# Altium PCB PCB1.PcbDoc (part 3 of 3)
Units mil, origin at the board's own origin, x right, y up, seen from the top; angles counter-clockwise.
Board outline 3200 x 1500 mil, 4 copper layers (L1, L2, L3, L4), stack 61.583 mil thick; 64 components, 73 nets, 299 pads, 164 vias.
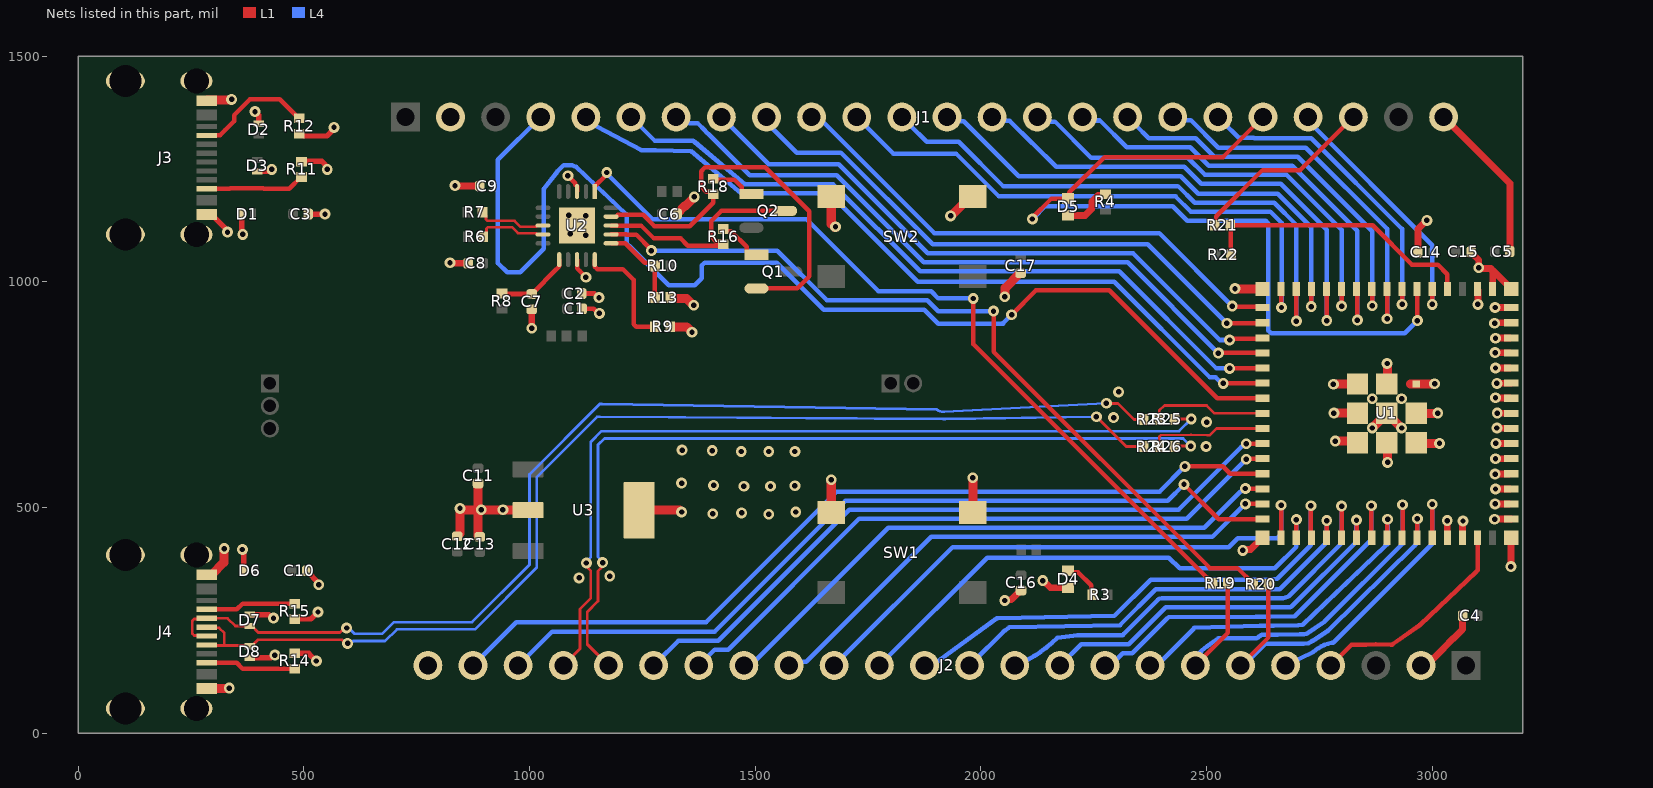
[diagram p4: the nets of this part, all layers, seen from the top]

## Via types
v1: diameter 24, hole 12, L1 to L4, tented both sides, 164 vias

## Nets (pads, with @x,y where several pads share a name; then routed paths per layer and width w, separated by ;. In a path a pad name is that pad's centre, name@x,y a point inside that pad or via, vN(x,y) a via of type N, cw(c..) or ccw(c..) an arc to the next point about the centre after c; other vN are vias at no path point) (continued)
CON2_USB_N: D7.2 J4.A7 J4.B7 R23.1 | length 2540
  L1 w6.02: J4.A7@284.84,215.16 283.39,216.61 257.02,216.61 253.19,220.44 253.19,249.08 257.1,252.99 283.31,252.99 J4.B7@284.84,254.53 331.11,254.53 348.44,237.2 D7.2@380,237.2 384.92,237.2 399.13,223 580.46,223 590.46,233 v1(595,233) ; v1(2278,731) 2278.85,730.15 2303.85,730.15 2339,695 R23.1@2361,695
  L4 w6.02: v1(595,233) 599.87,233 612.87,220 673.49,220 699.49,246 872.86,246 999.98,373.12 999.98,573.49 1155.72,729.24 1160.71,729.24 1901.96,717.02 ccw(c1917,737) 1918,712.01 ccw(c1917,737) 1918.32,712.02 v1(2278,731)
CON2_USB_P: D8.2 J4.A6 J4.B6 R24.1 | length 2511.6
  L1 w6.02: J4.B6@284.84,195.47 286.18,194.13 324,194.13 ; J4.A6@284.84,234.84 286.39,233.29 312.57,233.29 324,221.86 324,194.13 ; v1(597,199) 592.46,199 584.48,206.98 398.79,206.98 388.8,196.99 388.8,196.68 384.92,192.8 D8.2@380,192.8 378.66,194.13 324,194.13 ; v1(2256,701) 2322,635 R24.1@2361,635
  L4 w6.02: v1(597,199) 600.44,202.44 607.98,202.44 609.52,203.98 680.12,203.98 706.12,229.98 879.49,229.98 1016,366.49 1016,566.86 1148.38,699.24 1150.14,701 1155.13,701 1916.73,695.97 ccw(c1917,737) 1917.51,695.97 1921.71,695.97 v1(2256,701)
CON_ESP_USB_N: J2.21 R25.1 | length 1917.5
  L1 w6.02: J2.21@1075,150 1111.99,186.99 1111.99,275.01 1136,299.02 1136,359.46 1129.44,366.02 1129.44,373.56 v1(1126,377) ; R25.1@2429,695 2430,696 v1(2466,696)
  L4 w6.02: v1(1126,377) 1126,380.54 1136,390.54 1136,645.66 1159.35,669.01 2439.01,669.01 v1(2466,696)
CON_ESP_USB_P: J2.20 R26.1 | length 1888.6
  L1 w6.02: v1(1162,378) 1158.56,374.56 1158.56,365.56 1152.02,359.02 1152.02,292.38 1128.01,268.37 1128.01,196.99 J2.20@1175,150 ; R26.1@2429,635 2436.62,636 v1(2465,636)
  L4 w6.02: v1(1162,378) 1162,380.54 1152.02,390.52 1152.02,639.02 1165.99,652.99 2448.01,652.99 v1(2465,636)
CON_GPIO0: J1.22 R21.1 | length 416.1
  L1 w10: R21.1@2517.99,1125 2521.58,1128.58 2521.58,1145.07 2623.97,1247.47 2707.47,1247.47 J1.22@2825,1365
DTR_FTDI: Q2.3 R16.1 U2.18 | length 504.2
  L1 w10: U2.18@1180.73,1124.59 1247.11,1124.59 1275.7,1096 1334.91,1096 1350.91,1080 R16.1@1425,1080 ; R16.1@1429,1082.99 1423.37,1088.62 1413.73,1088.62 1402.19,1100.16 1402.19,1133.85 1425.34,1157 Q2.3@1566.42,1157
ESP_USB_N: R23.2 R25.2 U1.23 | length 260.3
  L1 w6.02: R25.2@2394.98,695 2395.02,714.45 2406.57,726 2500.17,726 2517.71,708.46 U1.23@2623.82,708.46
ESP_USB_P: R24.2 R26.2 U1.24 | length 258.1
  L1 w6.02: R26.2@2394.98,635 2395.02,656.63 2396.78,658.4 2398.54,660.16 2464.68,661.01 cw(c2465,636) 2465.58,661 2502.17,660.16 2507.16,660.16 2508.92,661.92 2522,675 U1.24@2623.82,675
FTDI_RESET: C7.2 R8.2 U2.11 | length 167.6
  L1 w10.01: R8.2@939,974.01 940.08,972.93 C7.2@1005,972.93 ; C7.2@1005.84,972.93 1011.42,978.51 1011.42,979.35 1055.07,1023 1065.94,1033.87 U2.11@1065.94,1049.17
FTDI_USB_N: R6.2 U2.9 | length 154
  L1 w6.03: R6.2@897.01,1100 904.62,1107.61 904.62,1117.47 908.16,1121 960.93,1121 974.2,1107.73 1014.37,1107.73 1017.19,1104.9 U2.9@1029.9,1104.9
FTDI_USB_P: R7.2 U2.8 | length 153
  L1 w6.03: R7.2@896.01,1154 903.62,1146.39 903.62,1138.56 907.16,1135.03 966.74,1135.03 980.01,1121.76 1014.37,1121.76 1017.19,1124.59 U2.8@1029.9,1124.59
GND: C1.1 C2.1 C3.1 C4.1 C5.1 C6.1 C7.1 C8.1 C9.1 C10.1 C11.1 C12.1 C13.1 C14.1 C15.1 C16.1 C17.1 D1.1 D2.1 D3.1 D4.1 D6.1 D7.1 D8.1 J1.2 J1.24 J2.2 J2.24 J3.A1B12 J3.B1A12 J3.S1 J3.S2 J3.S3 J3.S4 J4.A1B12 J4.B1A12 J4.S1 J4.S2 J4.S3 J4.S4 R9.2 R11.1 R12.1 R13.2 R14.1 R15.1 SW1.3 SW1.4 SW2.3 SW2.4 U1.1 U1.2 U1.42 U1.43 U1.46 U1.47 U1.48 U1.49 U1.50 U1.51 U1.52 U1.53 U1.54 U1.55 U1.56 U1.57 U1.58 U1.59 U1.60 U1.61 U1.62 U1.63 U1.64 U1.65 U1.66 U1.67 U1.68 U1.69 U1.70 U1.71 U1.72 U1.73 U2.3 U2.13 U2.21 U3.2 U3.4 | length 4242.1
  L1 w10.01: v1(1085,1235) 1085,1234.7 1101.41,1218.29 1101.41,1215.2 1105.32,1211.29 U2.3@1105.32,1200 ; U2.13@1105.32,1049.17 1105.55,1048.94 1105.55,1029.45 1112,1023 v1(1125,1010) ; C2.1@1115.93,974 1145,974 v1(1154,965) ; C1.1@1116.93,940 1142.57,940 1152.57,930 v1(1155,930)
  L1 w12: J3.B1A12@284.84,1149.02 295.67,1149.02 328.7,1115.98 328.7,1112.3 v1(331,1110) ; D1.1@362.2,1150 362.2,1107.8 v1(365,1105) ; v1(364,407) 367.2,403.8 D6.1@367.2,360 ; D8.1@380,167.2 426.96,167.2 432.75,173 v1(436,173) ; D7.1@380,262.8 421.96,262.8 429.75,255 v1(433,255) ; v1(392,1377) 400,1369 D2.1@400,1350 ; D3.1@397,1244.2 397.89,1245.09 425.09,1245.09 v1(429,1249) ; R14.1@480,177.01 510.99,177.01 v1(528,160) ; R15.1@480,252.99 515.99,252.99 v1(531.5,268.5) ; R11.1@500,1267.01 539.99,1267.01 547,1260 ; R12.1@500,1322.99 550.99,1322.99 v1@561,1333 ; C10.1@506.93,360 506.93,358.82 533,332.75 v1(533,328.87) v1@533,325 ; C3.1@510,1150 v1(547,1150)
  L1 w15: v1(824,1042) 825,1041 C8.1@864.07,1041 ; v1(835,1213) 836,1212 C9.1@890.07,1212 ; v1(1005,897) C7.1@1005,939.07 ; v1(2053,294) 2054.72,295.72 2067.47,295.72 2084.69,312.94 2085.87,312.94 C16.1@2089,316.07 ; v1@2139,337 2153.7,322.3 D4.1@2193,322.3 ; v1(2580,405) 2581.72,406.72 2597.67,406.72 U1.64@2623.82,432.87 ; C14.1@2968.07,1065 2968.07,1117.07 v1@2987,1136 ; J2.2@2975,150 2987,150 3025.5,188.5 3025.5,189.25 3045.95,209.7 3046.7,209.7 3067.14,230.14 C4.1@3067.14,260 ; J1.24@3025,1365 3171.93,1218.07 3171.93,1069.93 C5.1@3171,1069 ; v1(3033,471) 3033.13,470.87 3033.13,439.08 U1.42@3033.06,439.01 ; U1.43@3066.73,432.87 3066.73,468.73 v1(3068,470) ; C15.1@3085.93,1066 3085.93,1064.82 3103,1047.75 v1@3103,1033 ; v1@3100.94,950.06 U1.2@3100.94,981.99 ; v1@3106,1030 3106.72,1029.28 3129.78,1029.28 ; 3132,1025 3133.66,1023.34 U1.1@3133.66,984.06 ; 3133.03,1026.03 U1.62@3175,984.06 ; v1(3138,908) 3139.25,909.25 U1.59@3175,909.25 ; v1@3138.21,474.21 U1.46@3175,474.21 ; v1(3139,508) 3139.16,507.84 3170.77,507.84 U1.47@3170.93,508 ; v1(3139,574) 3143.09,574 3143.16,574.06 3165.83,574.06 3166,574.23 U1.49@3170.99,574.23 ; v1(3139,843) 3165.7,843 3166,842.7 U1.57@3170.93,842.7 ; v1@3139.06,943.06 U1.60@3170.99,943.06 ; v1(3140,541) 3140.07,541.07 U1.48@3171.98,541.07 ; v1(3140,608) v1(3140,608) 3174.96,608.04 U1.50@3175,608.07 ; v1(3140,743) 3140.7,742.3 U1.54@3171.93,742.3 ; v1(3140,809) 3140.07,808.93 3171.86,808.93 U1.56@3171.93,809 ; v1(3140,875) 3143.74,875 3144.16,875.41 U1.58@3171.99,875.41 ; v1(3141,642) 3141.23,641.77 3172.79,641.77 U1.51@3172.93,641.91 ; v1(3143,676) 3143.63,675.37 U1.52@3174.93,675.37 ; v1(3143,775) 3143.2,775.2 3174.86,775.2 U1.55@3174.99,775.06 ; v1(3144,709) 3144.27,708.73 3175.82,708.73 U1.53@3175.93,708.84 ; v1(3174,369) 3174.5,369.5 3174.5,432.37 U1.65@3175,432.87
  L1 w20: J4.B1A12@284.84,99.02 334.02,99.02 v1(335,100) ; J4.A1B12@284.84,350.98 295.67,350.98 323.23,378.55 323.23,408.23 v1(324,409) ; J3.A1B12@284.84,1400.98 286.42,1402.56 337.48,1402.56 338.92,1404 v1(340,1404) ; C12.1@840,435.93 841.18,435.93 841.81,436.56 841.81,437.74 846,441.93 v1(846,498) 847.08,498 851.08,494 v1@886,494 ; C11.1@886,551.07 v1@886,494 ; C13.1@890,434.93 888.82,434.93 886,437.75 v1@886,494 ; v1@893,494 941,494 U3.2@996.97,494 ; U3.4@1243.03,494 1331.92,494 1335.92,490 v1(1337,490) ; R9.2@1312.01,900 1348.28,900 v1(1360,888.28) v1@1360,888 ; R13.2@1312.01,965 1312.01,963.82 1312.64,963.19 1347.73,963.19 1362.92,948 v1(1364,948) ; C6.1@1326.93,1150 1326.93,1151.18 1343.94,1168.19 1345.92,1168.19 1365,1187.27 v1(1365,1188) ; SW1.4@1668.5,488.58 v1(1668.5,561.5) ; SW2.4@1668.5,1188.58 1668.5,1128.5 v1@1677,1120 ; v1(1933,1146) 1933.99,1146 1976.57,1188.58 SW2.3@1981.5,1188.58 ; SW1.3@1981.5,488.58 1982,489.09 v1(1982,566) ; v1(2053,967) 2053.77,967.77 2053.77,986.02 2086.19,1018.44 2087.37,1018.44 C17.1@2088,1019.07 ; v1@2566.06,984.06 U1.63@2623.82,984.06 ; v1@2782,773 2782.43,773.43 U1.71@2834.45,773.43 ; v1@2783.43,709.43 U1.72@2835.45,709.43 ; v1@2786.43,647.43 U1.73@2838.45,647.43 ; v1(2867,676) 2867,676.06 U1.61@2899.41,708.46 2931.87,676 v1(2932,676) ; U1.69@2900.43,765.55 v1@2900.43,817.57 ; v1@2900.57,601.43 U1.70@2900.57,653.45 ; 2951.55,773.57 v1@3003.57,773.57 ; U1.67@2958.55,708.57 v1@3010.57,708.57 ; U1.68@2962.55,641.57 v1@3014.57,641.57
  other v1: 2137,338 1110,344 1178,348 3138,474 1530,485 1406,486 1470,488 1590,490 893,495 941,495 1475,547 1534,547 1588,548 1408,549 1337,554 2901,600 1469,624 1530,624 1588,624 1405,626 1338,627 2499,635 3016,642 2785,647 2500,689 2294,699 2782,709 3012,709 2867,741 2932,741 2305,756 2781,773 3005,774 2900,819 3139,943 3101,950 2563,985 3103,1031 1125,1103 1090,1106 1678,1122 2988,1136 1125,1146 1087,1147 552,1249 567,1342
GPIO0: R21.2 R22.2 U1.4 | length 624.6
  L1 w10: R22.2@2554.02,1060 2553.01,1061 2553.01,1124 R21.2@2552.01,1125 2867.72,1125 2954.53,1038.19 3011.81,1038.19 3033.27,1016.73 U1.4@3033.27,984.06
GPIO1: J1.21 U1.5 | length 568
  L1 w10: U1.5@2999.8,984.06 2999.9,983.96 2999.9,945.1 v1@3000,945
  L4 w10: J1.21@2725,1365 2725,1356 3000,1081 v1(3000,950)
GPIO2: D5.1 J1.20 U1.6 | length 1805.4
  L1 w10: v1(2114,1139) 2114,1142 2156.4,1184.4 D5.1@2193,1184.4 2196,1187.4 2196,1198 2274.33,1276.33 2536.33,1276.33 J1.20@2625,1365 ; v1(2967,914) U1.6@2967,979.46
  L4 w10: v1@2117,1142 2142,1167 2425,1167 2457,1135 2631.14,1135 2637,1129.14 2637,891.86 2642.86,886 2939,886 v1(2967,914)
GPIO3: J1.19 U1.7 | length 705.7
  L1 w10: v1(2933,950) 2932.94,950.06 2932.94,981.99 U1.7@2933,982.06
  L4 w10: J1.19@2525,1355 2535,1355 2571,1319 2604.53,1319 2605.53,1318 2732,1318 2933,1117 v1(2933,950)
GPIO4: J1.18 U1.8 | length 842.2
  L1 w10: v1(2900,918) U1.8@2900,983.46
  L4 w10: J1.18@2425,1365 2431.73,1358.27 2464.73,1358.27 2526,1297 2720,1297 2900,1117 v1(2900,918)
GPIO5: J1.17 U1.9 | length 834.5
  L1 w10: U1.9@2866.94,978.99 2866.47,978.53 2866.47,947.53 v1(2867,947)
  L4 w10: J1.17@2334,1356 J1.17@2334,1371 ; J1.17@2342.36,1347.36 2342.64,1347.36 2372,1318 2476,1318 2517,1277 2702,1277 2867,1112 v1(2867,947)
GPIO6: J1.16 U1.10 | length 976.8
  L1 w10: v1(2834,915) U1.10@2834,980.46
  L4 w10: J1.16@2225,1365 2232.73,1357.27 2263.73,1357.27 2323,1298 2463.71,1298 2504.71,1257 2690,1257 2834,1113 v1(2834,915)
GPIO7: J1.15 U1.11 | length 972.3
  L1 w10: v1(2799,946) U1.11@2799.01,977.92
  L4 w10: J1.15@2127,1355 2164,1355 2244,1275 2458.42,1275 2496.42,1237 2677,1237 2799,1115 v1(2799,946)
GPIO8: J1.14 U1.12 | length 1110.6
  L1 w10: v1(2766,914) U1.12@2766,979.46
  L4 w10: J1.14@2025,1365 2033.73,1356.27 2064.04,1356.27 2167.25,1255 2450.14,1255 2488.14,1217 2664.28,1217 2766,1115.28 v1(2766,914)
GPIO9: J1.13 U1.13 | length 1116
  L1 w10: v1(2732,945) v1(2732,945) 2732.04,976.89 U1.13@2732,976.93
  L4 w10: J1.13@1925,1365 1934.23,1355.77 1962.23,1355.77 2084,1234 2442.85,1234 2481.85,1195 2657.99,1195 2732,1120.99 v1(2732,945)
GPIO10: J1.12 U1.14 | length 1249.3
  L1 w10: v1(2699,913) U1.14@2699,978.46
  L4 w10: J1.12@1842,1370 1842,1348 1880,1310 1951,1310 2049,1212 2436.57,1212 2473.57,1175 2649.71,1175 2699,1125.71 v1(2699,913)
GPIO11: J1.11 U1.15 | length 1267
  L1 w10: U1.15@2665.16,984.06 2665.16,943.84 v1(2666,943)
  L4 w10: J1.11@1725,1365 1806,1284 1945,1284 2040,1189 2431.28,1189 2465.28,1155 2641.43,1155 2666,1130.43 v1(2666,943)
GPIO12: J1.10 U1.16 | length 1165.8
  L1 w10: v1(2557,946) 2558.64,944.36 2614.29,944.36 U1.16@2615.93,942.72
  L4 w10: J1.10@1625,1365 1639.61,1365 1896.61,1108 2395,1108 v1(2557,946)
GPIO13: J1.9 U1.17 | length 1284.2
  L1 w10: v1(2545,908) 2545.63,908.63 2616.27,908.63 U1.17@2617.27,909.63
  L4 w10: J1.9@1540,1366 1540,1337.74 1591.74,1286 1690,1286 1893,1083 2370,1083 v1(2545,908)
GPIO14: J1.8 U1.18 | length 1388
  L1 w10: v1(2551,871) 2553.39,873.39 2621.43,873.39 U1.18@2623.82,875.79
  L4 w10: J1.8@1438,1353 1438,1352 1530,1260 1685,1260 1882,1063 2337,1063 2529,871 v1(2551,871)
GPIO15: J1.7 U1.19 | length 1515.6
  L1 w10: v1(2526,842) 2526.32,842.32 U1.19@2623.82,842.32
  L4 w10: J1.7@1325,1365 1339.61,1365 1353.85,1350.77 1373.21,1350.77 1388.17,1335.8 ccw(c1425,1365) 1395.8,1328.17 1479.37,1244.63 1488,1236 1680.72,1236 1873.72,1043 2325,1043 v1(2526,842)
GPIO16: J1.6 U1.20 | length 1625.2
  L1 w10: v1(2551,808) 2551.43,808.43 2623.39,808.43 U1.20@2623.82,808.86
  L4 w10: J1.6@1225,1365 1278,1312 1359.63,1312 1363.28,1312 1366.08,1309.64 1477.02,1216 1480.43,1216 1672.43,1216 1675.36,1213.07 1865.43,1023 2306.82,1023 2521.82,808 v1(2551,808)
GPIO17: J1.5 U1.21 | length 1720.3
  L1 w10: v1@2546.91,775.39 U1.21@2623.82,775.39
  L4 w10: J1.5@1125,1365 1127.51,1356.78 1130.33,1353.96 1247.2,1291.72 1280.02,1291.72 1357.79,1289.65 1468.94,1196 1664.15,1196 1667.08,1193.07 1860.15,1000 2295.47,1000 2507.47,788 2520.21,788 2533.21,775 v1(2537,775)
GPIO18: J1.4 U1.22 | length 2613.4
  L1 w10: v1(2068,927) 2122,981 2284.31,981 2523.38,741.93 U1.22@2623.82,741.93
  L4 w10: J1.4@1025,1365 930,1270 930,1041.5 950.5,1021 979.5,1021 992,1033.5 1031.49,1072.99 1031.49,1201.82 1031.49,1205.87 1062,1244.53 1075.47,1258 1094.53,1258 1103.42,1254.27 1215,1149.01 1215,1085.82 1224,1076.82 1308.82,992 1366.18,992 1382,1007.82 1382,1036.14 1387.86,1042 1547.72,1042 1651.72,938 1874.22,938 1905.22,907 2049,907 2051,909 2050,909 v1(2068,927)
GPIO21: J2.19 U1.25 | length 1539.3
  L1 w10: v1(2588,641) 2588.27,641.27 2619.79,641.27 U1.25@2619.99,641.06
  L4 w10: J2.19@1283,156 1283,158 1330,205 1418.28,205 1708.28,495 2437.82,495 2576.82,634 2577.21,634 2584.21,641 v1(2588,641)
GPIO26: J2.18 U1.26 | length 1434.7
  L1 w10: v1(2588,607) 2588.54,607.54 2619.52,607.54 U1.26@2619.99,607.06
  L4 w10: J2.18@1375,150 1410,185 1440,185 1730,475 2456,475 v1(2588,607)
GPIO33: J2.17 U1.28 | length 1305.7
  L1 w10: v1(2586,542) 2586.43,541.57 2617.5,541.57 U1.28@2617.93,542
  L4 w10: J2.17@1475,150 1489.61,150 1505.35,165.73 1505.73,165.73 1795,455 2494.82,455 2574.82,535 2575.21,535 2582.21,542 v1(2586,542)
GPIO34: J2.16 U1.29 | length 1191.4
  L1 w10: v1(2586,508) 2586.16,507.84 2617.77,507.84 U1.29@2617.93,508
  L4 w10: J2.16@1575,150 1583.23,158.23 1613.23,158.23 1890,435 2513,435 v1(2586,508)
GPIO35: J2.15 U1.31 | length 1241.6
  L1 w10: U1.31@2665,439.54 v1(2665,505)
  L4 w10: J2.15@1671,156 1681,156 1937.18,412.18 2549,412.18 2568.82,432 2656.14,432 2665,440.86 v1(2665,505)
GPIO36: J2.14 U1.32 | length 1135.8
  L1 w10: U1.32@2699,441.07 2698.81,441.26 2698.81,472.81 v1(2699,473)
  L4 w10: J2.14@1783,156 1783,158 2014,389 2416.5,389 2440.5,365 2651.28,365 2699,412.72 v1(2699,473)
GPIO37: J2.13 U1.33 | length 1107.8
  L1 w10: U1.33@2731,438.54 v1(2731,504)
  L4 w10: J2.13@1875,150 1885.28,148.39 1889.32,148.39 2034.6,254.29 2037.74,254.35 2295.93,259.93 2376,340 2632.57,340 2656.5,341.93 2731,416.43 v1(2731,504)
GPIO38: J2.12 U1.34 | length 979.3
  L1 w10: U1.34@2766,439.07 2765.78,439.3 2765.78,470.78 v1(2766,471)
  L4 w10: J2.12@1982,149 1982,157 2050,225 2060.71,232.65 2063.23,234.44 2308.29,239.56 2387.73,319 2661.85,319 2766,423.15 v1(2766,471)
GPIO39: J2.11 U1.35 | length 974.2
  L1 w10: U1.35@2799,437.54 v1(2799,503)
  L4 w10: J2.11@2075,150 ccw(c1978.97,401.92) 2169.59,211.27 2213.72,217 2314.01,217 2316.94,219.93 2392.08,295.07 2395.01,298 2400.96,299 2670.14,299 2679.93,301.93 2681.71,303.71 2799,421 v1(2799,503)
GPIO40: J2.10 U1.36 | length 850.2
  L1 w10: v1(2832,472) 2832.24,471.76 2832.24,440.18 U1.36@2832.06,440.01
  L4 w10: J2.10@2175,150 2222,197 2327.25,197 2409.25,279 2685.28,279 2687.77,280.61 2689.79,281.93 2832,424.14 v1(2832,472)
GPIO41: J2.9 U1.37 | length 845.4
  L1 w10: U1.37@2865,438.54 v1(2865,504)
  L4 w10: J2.9@2275,150 2287.47,150 2314.47,177 2335.53,177 2412.92,254.38 2415.84,257.31 2608.76,258 2609.76,258 2640.89,258 2695.15,259 2865,428.85 v1(2865,504)
GPIO42: J2.8 U1.38 | length 700.8
  L1 w10: U1.38@2901,442.07 2900.2,442.87 2900.2,473.2 v1(2901,474)
  L4 w10: J2.8@2392.64,153.03 2470.2,230.58 2472.99,233.38 2618.05,238 2649.17,238 2703.5,239.06 2713.25,239.85 2895.14,414.14 2901,420 v1(2901,474)
GPIO45: J2.5 U1.41 | length 580.6
  L1 w10: U1.41@3000,441.54 v1(3000,507)
  L4 w10: J2.5@2675,150 2736.63,180.12 2747.15,187.86 cw(c2787.16,133.46) 2777.48,200.29 2780.68,200.68 3000,420 v1(3000,507)
GPIO46: J2.4 U1.44 | length 473.5
  L1 w10: J2.4@2778,155 2780,155 2821,196 2853.66,196 2874.25,197.02 2874.5,197.03 2874.89,197.03 2907.69,196.07 2907.82,196.07 ; 2907.83,196.07 2911.03,196.07 2913.63,197.92 2972.64,239.93 2973.15,240.41 3097.17,357.69 3097.27,357.78 ; 3097.28,357.8 3100.2,360.71 U1.44@3100.2,432.87
GPIO47: J2.23 U1.27 | length 1931.2
  L1 w10: v1(2452,591) 2535.84,591 2552.23,574.61 U1.27@2623.82,574.61
  L4 w10: J2.23@880,155 971,246 1391.18,246 1680.18,535 2395.82,535 2451.82,591 v1(2452,591)
GPIO48: J2.22 U1.30 | length 1843.2
  L1 w10: v1(2450,551) 2526.79,474.21 U1.30@2623.82,474.21
  L4 w10: J2.22@986,149 986,161 1050,225 1410,225 1700,515 2414,515 v1(2450,551)
NetD4_2: D4.2 R3.1 | length 86.4
  L1 w10: D4.2@2193,359.7 2196.62,356.08 2215.92,356.08 2244.17,327.83 2244.17,309.82 R3.1@2246.99,307
NetD5_2: D5.2 R4.1 | length 108.4
  L1 w15: D5.2@2193,1147 2231.01,1147 2245.35,1161.34 2245.35,1176.53 2259.7,1190.88 2271.69,1190.88 2273,1192.19 R4.1@2273,1193
NetJ3_A5: J3.A5 R12.2 | length 263.2
  L1 w10: J3.A5@284.84,1324.21 285.15,1324.52 314.29,1324.52 314.86,1325.09 ; 314.91,1325.09 325,1335.19 345.49,1355.68 345.49,1368.67 380.82,1404 446.83,1404 488.82,1362.01 R12.2@490,1362.01
NetJ3_B5: J3.B5 R11.2 | length 221.5
  L1 w10: J3.B5@284.84,1206.1 325,1206.1 335.97,1206.1 336.68,1206.81 410.51,1206.81 411.22,1206.1 467.93,1206.1 493.82,1231.99 R11.2@495,1231.99
NetJ4_A5: J4.A5 R15.2 | length 200.5
  L1 w10: J4.A5@284.84,274.21 351.5,274.21 364.3,287.01 R15.2@480,287.01
NetJ4_B5: J4.B5 R14.2 | length 200.6
  L1 w10: J4.B5@284.84,156.1 351.19,156.1 364.3,142.99 R14.2@480,142.99
NetQ1_1: Q1.1 R16.2 | length 108.1
  L1 w10: R16.2@1425,1117.01 1430.63,1111.38 1447.2,1111.38 1481.28,1077.3 1481.28,1066.26 1487.55,1060 Q1.1@1503,1060
NetQ2_1: Q2.1 R18.2 | length 107.7
  L1 w10: R18.2@1402.51,1226 1454,1226 1469.86,1210.14 1469.86,1200.66 1476.12,1194.4 Q2.1@1491.58,1194.4
NetR9_1: R9.1 U2.15 | length 262.2
  L1 w10: U2.15@1144.69,1049.17 1144.69,1033.31 1149.84,1028.15 1206.85,1028.15 1230.5,1004.5 1230.5,905.86 1236.35,900 R9.1@1277.99,900
NetR10_1: R10.1 R13.1 U2.16 | length 188.8
  L1 w10: U2.16@1180.73,1085.22 1212.26,1085.22 1224,1073.47 1255.66,1041.81 1272.36,1041.81 1277.99,1036.18 R13.1@1277.99,965
RTS_FTDI: Q1.2 R18.1 U2.19 | length 890.2
  L1 w10: U2.19@1192.26,1144.5 1195.94,1148.18 1251.8,1148.18 1276.79,1123.19 1355.19,1123.19 1407,1175 R18.1@1407,1193.99 1401.37,1199.62 1391.73,1199.62 1380.19,1211.16 1380.19,1244.85 1388.98,1253.64 1522.38,1253.64 1619.56,1156.46 1619.56,1011.72 1593.04,985.2 Q1.2@1503,985.2
RXD_FTDI: R19.2 U2.1 | length 1821.2
  L1 w10: U2.1@1144.91,1211.53 1168.32,1234.94 1168.32,1239.32 v1(1171,1242) ; v1(1983,963) 1983,861.98 2499.17,345.81 2500.35,345.81 2512.98,333.18 R19.2@2512.98,332
  L4 w10: v1(1171,1242) 1171,1240 1272,1139 1613,1139 1773,979 1889.78,979 1905.78,963 v1(1983,963)
TXD_FTDI: R20.2 U2.17 | length 1797.7
  L1 w10: U2.17@1180.73,1104.9 1214.18,1104.9 1214.49,1104.59 1224,1104.59 1236.41,1104.59 1270,1071 v1(1270,1069) ; v1(2028,935) 2028,845.27 2507.45,365.81 2568.35,365.81 2602.98,331.18 R20.2@2602.98,330
  L4 w10: v1(1270,1069) 1549,1069 1659,959 1881.5,959 1905.5,935 v1(2028,935)
U0RXD: J2.6 R20.1 U1.40 | length 782.4
  L1 w10: J2.6@2575,150 2637,212 R20.1@2637,330 ; U1.40@2967.06,443.01 v1@2967.06,474.94
  L4 w10: J2.6@2590,148 2590,158 2630,198 2714.99,198 2725.19,199.05 2731.55,202.62 2734.41,204.43 2769.99,227.7 2961.14,415.72 2967,421.58 v1(2967,475)
U0TXD: J2.7 R19.1 U1.39 | length 937.6
  L1 w10: J2.7@2475,150 2547,222 R19.1@2547,332 ; U1.39@2934,440.54 v1(2934,506)
  L4 w10: J2.7@2475,150 2477.79,172.24 cw(c2714.33,-78.71) 2525.72,210 2610.23,210 2619.14,216.21 2621.72,218 2657.46,218 2706.54,219 2706.63,219 2710.06,219 2716.83,219.11 2720.5,219.85 2722.57,220.88 2761.7,247.7 2934,420 v1(2934,506)
pads on no net: J1.1 J3.A8 J3.B8 J4.A8 J4.B8 U2.2 U2.4 U2.5 U2.6 U2.7 U2.14

## Polygon pours and split planes (outlines as drawn)
GND on L1 "GND_L01_P010" (solid, pour order 10): 1626.08,225.2 1610,225.2 1616.38,356.25 1616.38,375 1621.92,470 1616.38,780 1070,780 1070,565 1040,535 915,535 915,555 905,565 875,565 875,520 870,515 835,515 835,455 815,435 825,425 910,425 915,430 915,470 1143.98,470 1182.55,433.62 1230,220
GND on L1 "GND_L01_P009" (solid, pour order 9): 2755,580 2755,835 3035,835 3035,580
+5V_VBUS2 on L1 "+5V_VBUS2_L01_P007" (solid, pour order 7): 445,695 450,690 450,665 490,625 490,345 480,335 475,340 385,340 380,345 380,375 385,380 390,375 450,375 450,620 420,650 415,650 400,665 400,685 410,695
+5V_VBUS1 on L1 "+5V_VBUS1_L01_P006" (solid, pour order 6): 469.29,1164.29 470,1165 485,1165 490,1160 490,1140 485,1135 445,1135 440,1130 440,820 450,810 450,750 405,750 395,760 395,1125 390,1130 380,1130 380,1165 435,1165 475,1165
+5V on L1 "+5V_L01_P005" (solid, pour order 5): 1038,602 1038,568 1032,562 961,564 953.5,573 872,573 752,693 745,700 427,703 430,703 433,703 414,703 401,716 401,735 413,747 433,747 440,740 527,740 757.22,740 898.67,598.55 951.4,602
+3V3_REG on L1 "+3V3_REG_L01_P004" (solid, pour order 4): 950,424 1038,424 1038,342 1015,319 1014,320 785,320 785,377 824,416 950,416
+3V3_FTDI on L1 "+3V3_FTDI_L01_P003" (solid, pour order 3): 940,954 957,954 957,929 953,925 923,925 923,926 890.5,957.5 884,1055 908,1060 913,1055 941,1055 961.75,1071.2 979,1059 979,1031 938,990 920,990 920,957.33
+3V3_FTDI on L1 "+3V3_FTDI_L01_P001" (solid, pour order 1): 1305,1138 1304,1137 1280,1137 1280,1142 1227,1195 1227,1239 1281,1239 1308,1212
+3V3 on L1 "+3V3_L01_P000" (solid, pour order 0): 2989,1096 2989,1052 3064,1052 3066,1054 3066,1077 3059,1084 3059,1092 3062,1092 3100,1130 3100,1136 3066,1170 3005,1170 3005,1119 2990,1104
+3V3 on L2 "+3V3_L02_P012" (solid, pour order 12): 3192.5,1442.5 1822.5,1442.5 1822.5,1402.5 1822.5,717.5 1892.5,717.5 1892.5,1222.5 2182.5,1222.5 2312.5,1092.5 2902.5,1092.5 2977.5,1017.5 3007.5,1017.5 3037.5,987.5 3037.5,717.5 3099.54,655.46 2605.89,112.5 3192.5,112.5
GND on L2 "GND_L02_P014" (solid, pour order 14): 30,20 3190,20 3185,25 3185,1470 30,1470 20,1480
+3V3_REG on L2 "+3V3_REG_L02_P013" (solid, pour order 13): 780,415 1030,415 1030,305 780,305
GND on L3 (split plane): 3199.95,0.05 0.05,0.05 0.05,1499.95 3199.95,1499.95

## Silkscreen, mask and mechanical layers (free items; w line width, h text height)
Top Overlay:
  text "J1" at 2851,1241 h40
  text "USER" at 2196,1056 h40
  text "UART" at 71,1016 h40
  text "BOOT/USR" at 1676,921 h40
  text "USB1" at 486,771 h40
  text "3V3" at 1906,761 h40
  text "REG" at 1631,756 h40
  text "+5V" at 486,711 h40
  text "USB2" at 486,641 h40
  text "RESET" at 1731,541 h40
  text "ESP" at 71,446 h40
  text "POWER" at 2171,421 h40
  text "J2" at 2826,236 h40
Bottom Overlay:
  text "IO15" at 1349,1269 h40 r90
  text "IO10" at 1859,1269 h40 r90
  text "GND" at 854,1264 h40 r90
  text "IO18" at 1054,1264 h40 r90
  text "IO17" at 1154,1264 h40 r90
  text "IO16" at 1249,1264 h40 r90
  text "IO14" at 1454,1264 h40 r90
  text "IO13" at 1559,1264 h40 r90
  text "IO12" at 1654,1264 h40 r90
  text "IO9" at 1959,1264 h40 r90
  text "IO0" at 2859,1264 h40 r90
  text "3V3" at 2969,1264 h40 r90
  text "GND" at 3064,1264 h40 r90
  text "NC" at 744,1259 h40 r90
  text "5V" at 954,1259 h40 r90
  text "IO11" at 1759,1259 h40 r90
  text "IO8" at 2054,1259 h40 r90
  text "IO7" at 2149,1259 h40 r90
  text "IO6" at 2249,1259 h40 r90
  text "IO5" at 2359,1259 h40 r90
  text "IO4" at 2454,1259 h40 r90
  text "IO2" at 2649,1259 h40 r90
  text "IO1" at 2754,1259 h40 r90
  text "IO3" at 2554,1254 h40 r90
  text "<PIN1>" at 3039,839 h60 r90
  text "IO47" at 859,389 h40 r90
  text "IO48" at 969,389 h40 r90
  text "USB-" at 1069,389 h40 r90
  text "USB+" at 1169,389 h40 r90
  text "IO21" at 1279,389 h40 r90
  text "IO26" at 1369,389 h40 r90
  text "IO36" at 1774,389 h40 r90
  text "GND" at 764,384 h40 r90
  text "IO33" at 1469,384 h40 r90
  text "IO34" at 1574,384 h40 r90
  text "IO35" at 1664,384 h40 r90
  text "IO37" at 1874,384 h40 r90
  text "IO38" at 1974,384 h40 r90
  text "IO39" at 2074,384 h40 r90
  text "IO40" at 2169,384 h40 r90
  text "IO41" at 2274,379 h40 r90
  text "IO42" at 2369,379 h40 r90
  text "TXD" at 2474,379 h40 r90
  text "IO46" at 2764,379 h40 r90
  text "RDX" at 2569,374 h40 r90
  text "IO45" at 2659,374 h40 r90
  text "3V3" at 3069,374 h40 r90
  text "GND" at 2964,369 h40 r90
  text "EN" at 2854,291 h40 r90
Board Shape:
  the board outline again, w20

## Text inside footprints (layer, text, board x,y; h text height)
J1: Bottom Overlay "1" at 3016,1456 h40 r270
J2: Bottom Overlay "1" at 3052,66 h40 r270
J5: Top Overlay "1" at 351,756 h40